# Altium PCB Copy of PCB1.PcbDoc (part 1 of 2)
Units mil, origin at the board's own origin, x right, y up, seen from the top; angles counter-clockwise.
Board outline 1968.5 x 1865.39 mil, 6 copper layers (Top Layer, GND02, SIG03, PWR04, GND05, Bottom Layer), stack 59.435 mil thick; 118 components, 79 nets, 398 pads, 210 vias.
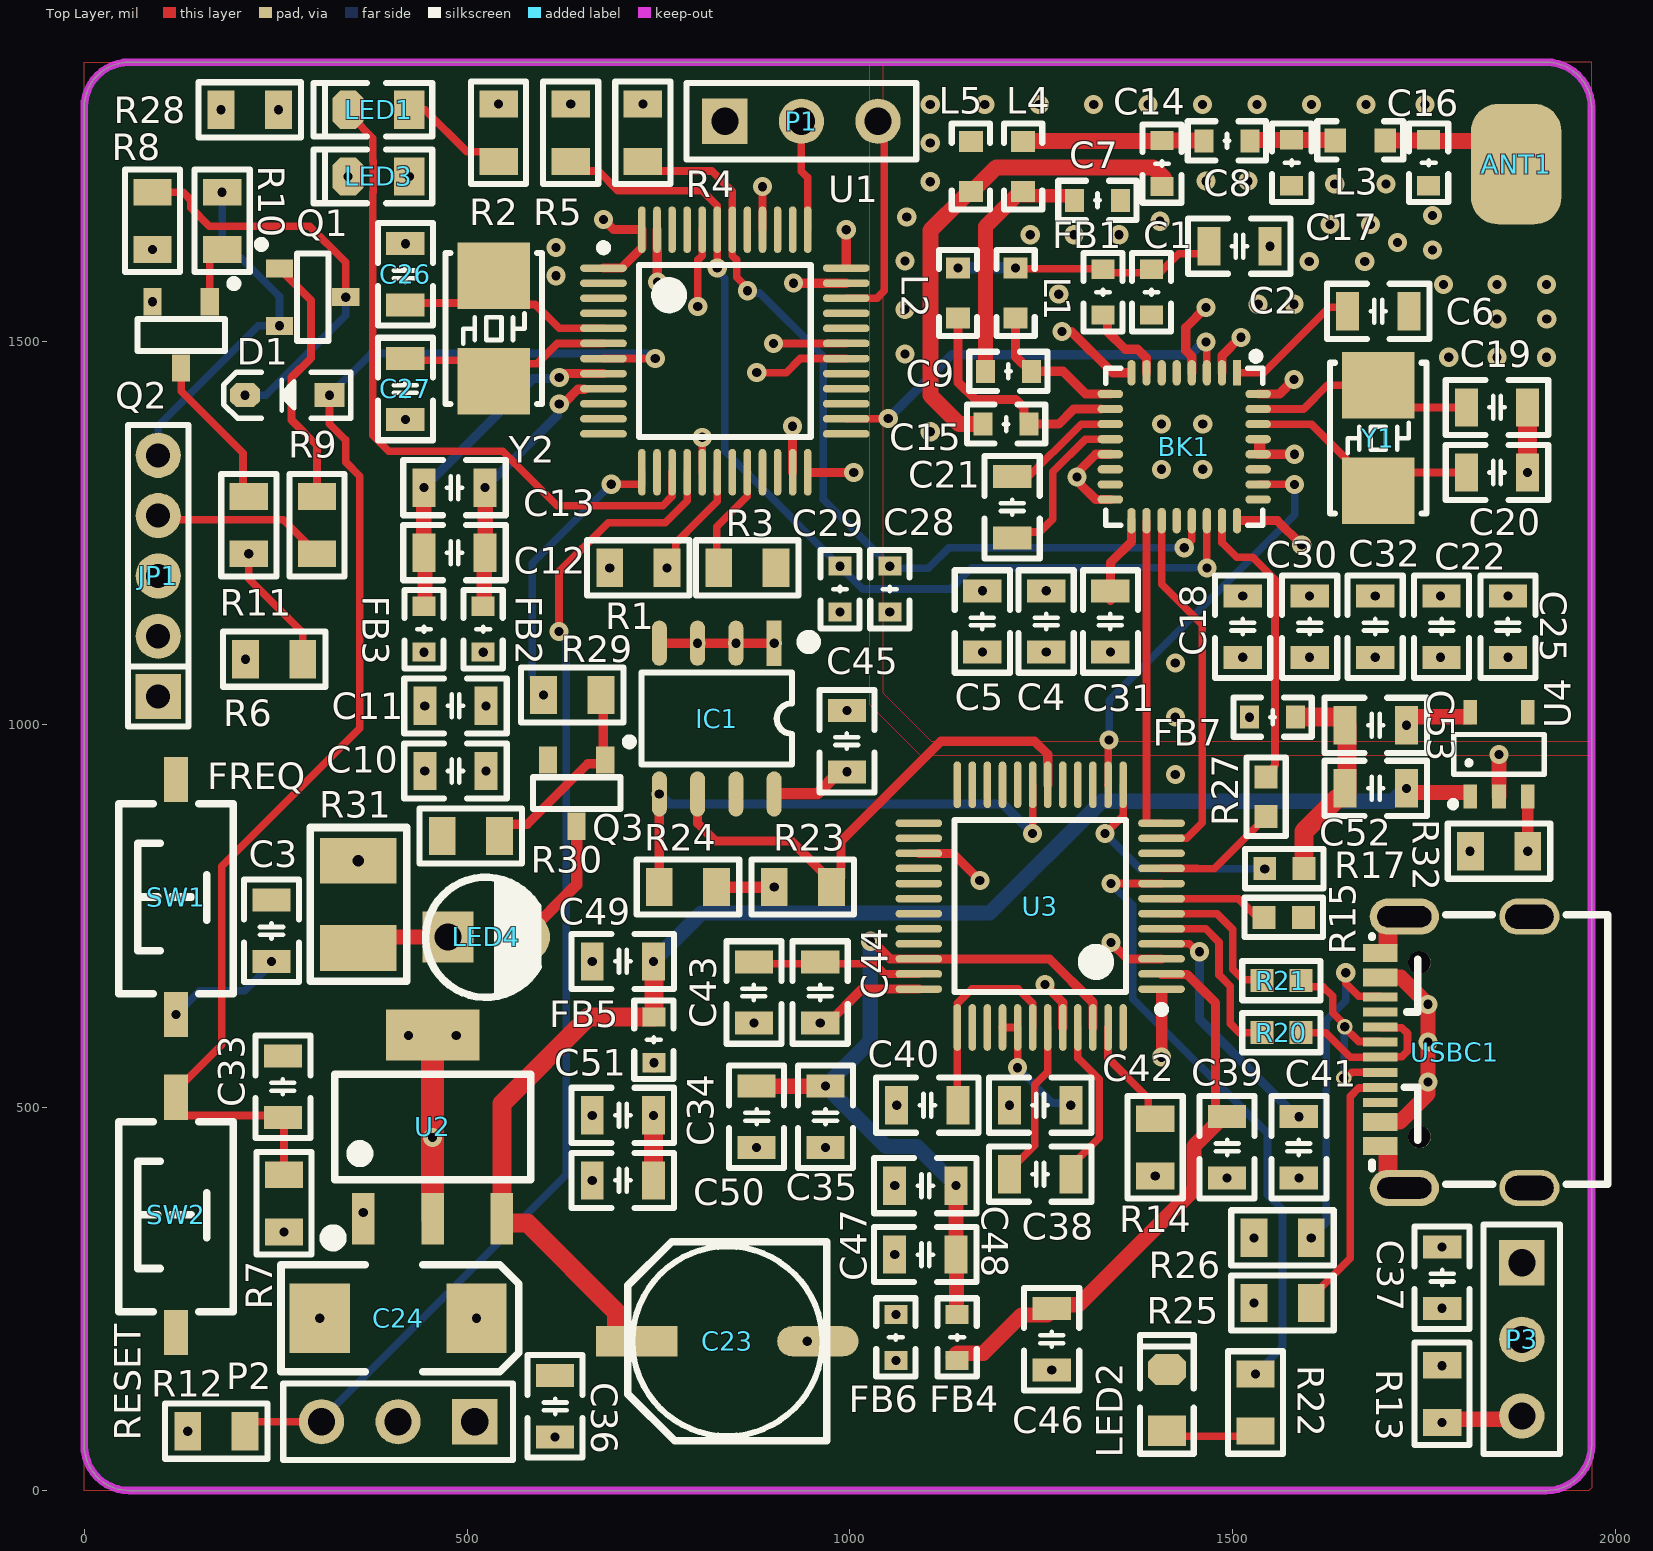
[diagram p0: Top Layer view]
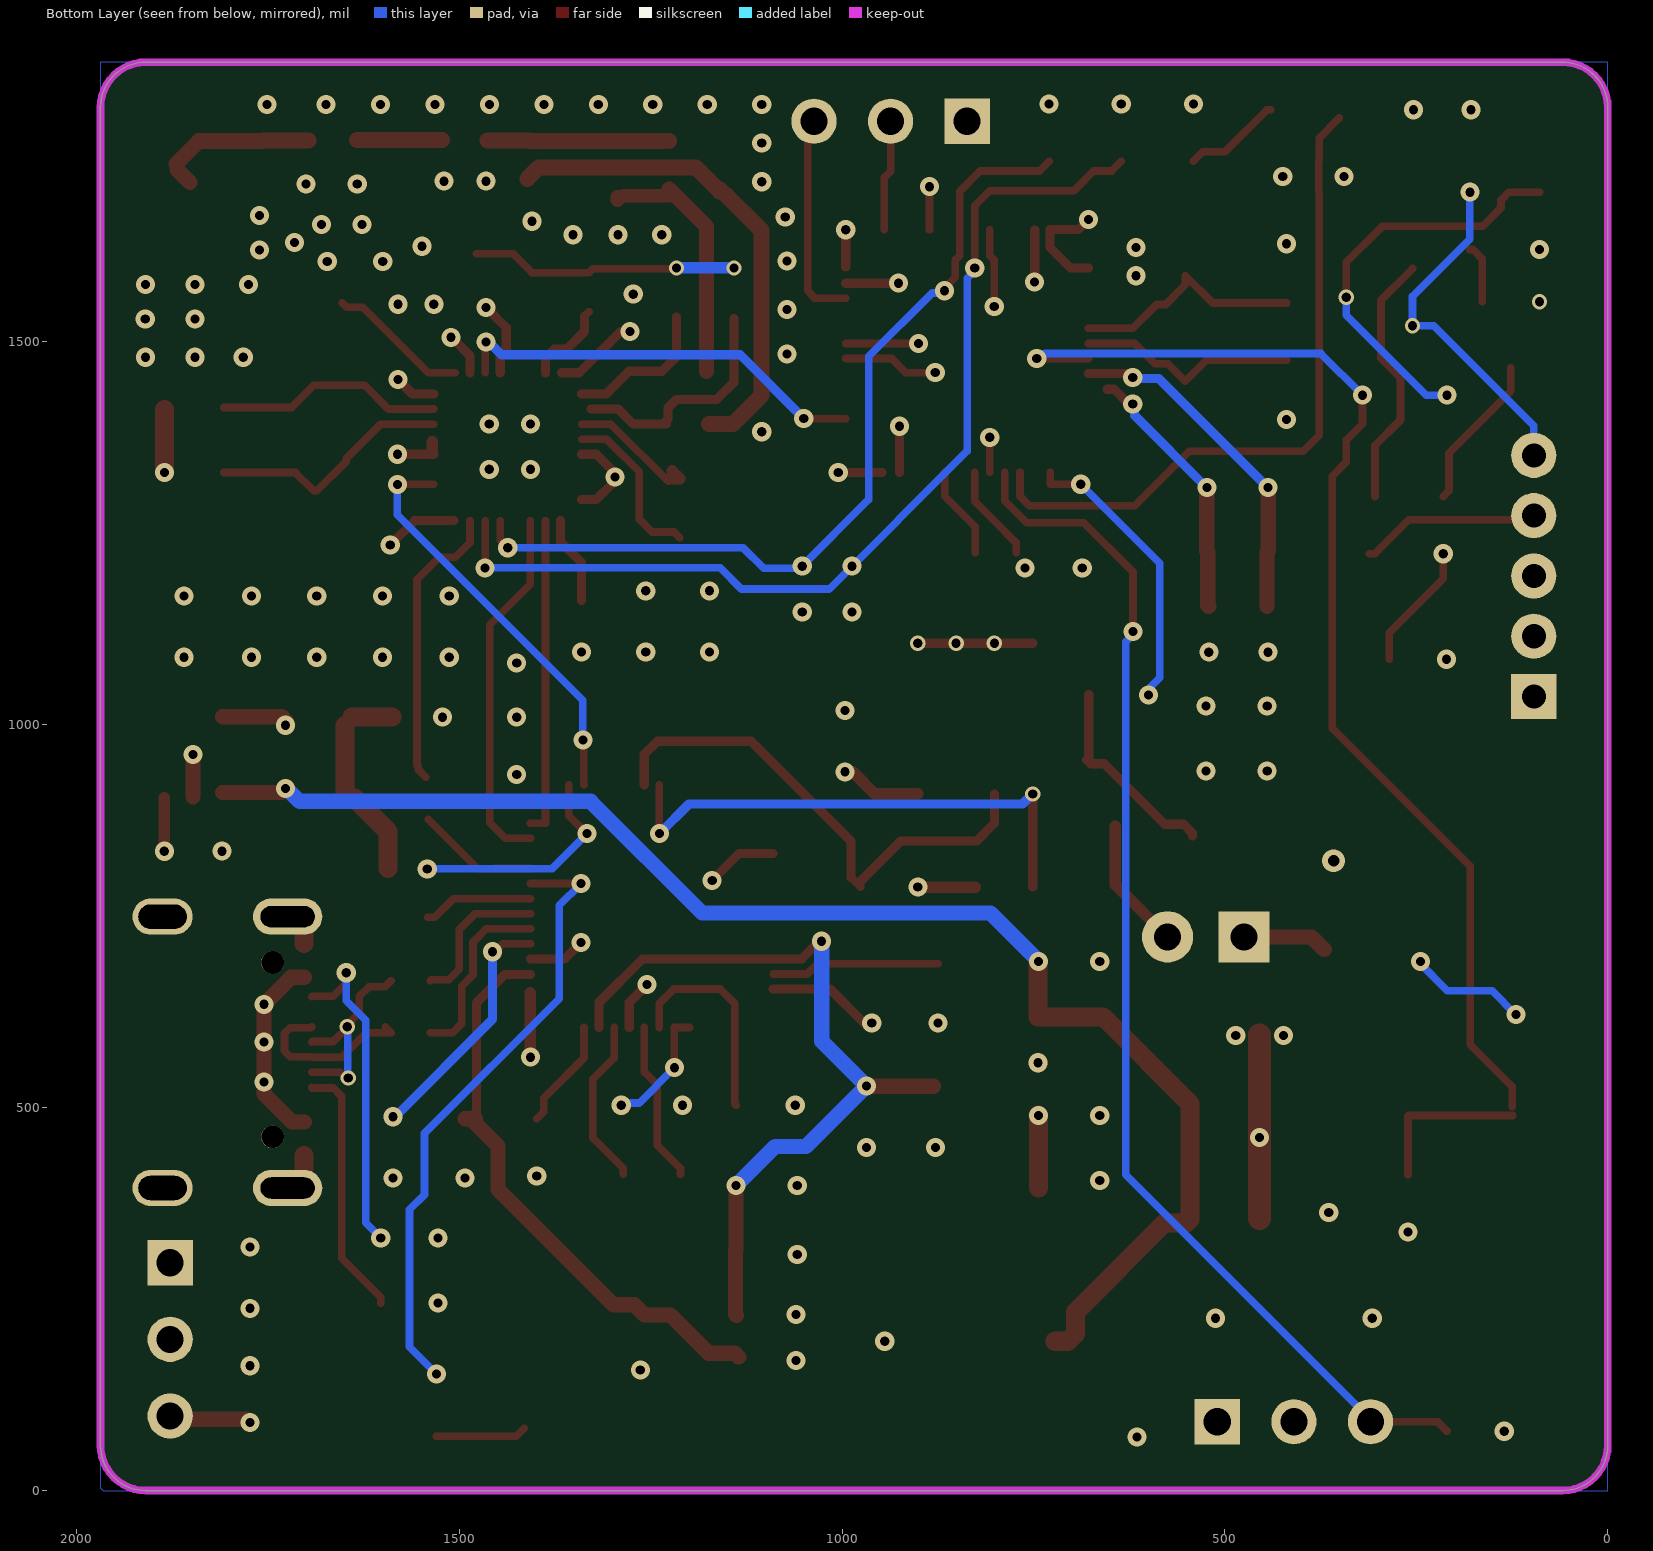
[diagram p1: Bottom Layer view, seen from below]
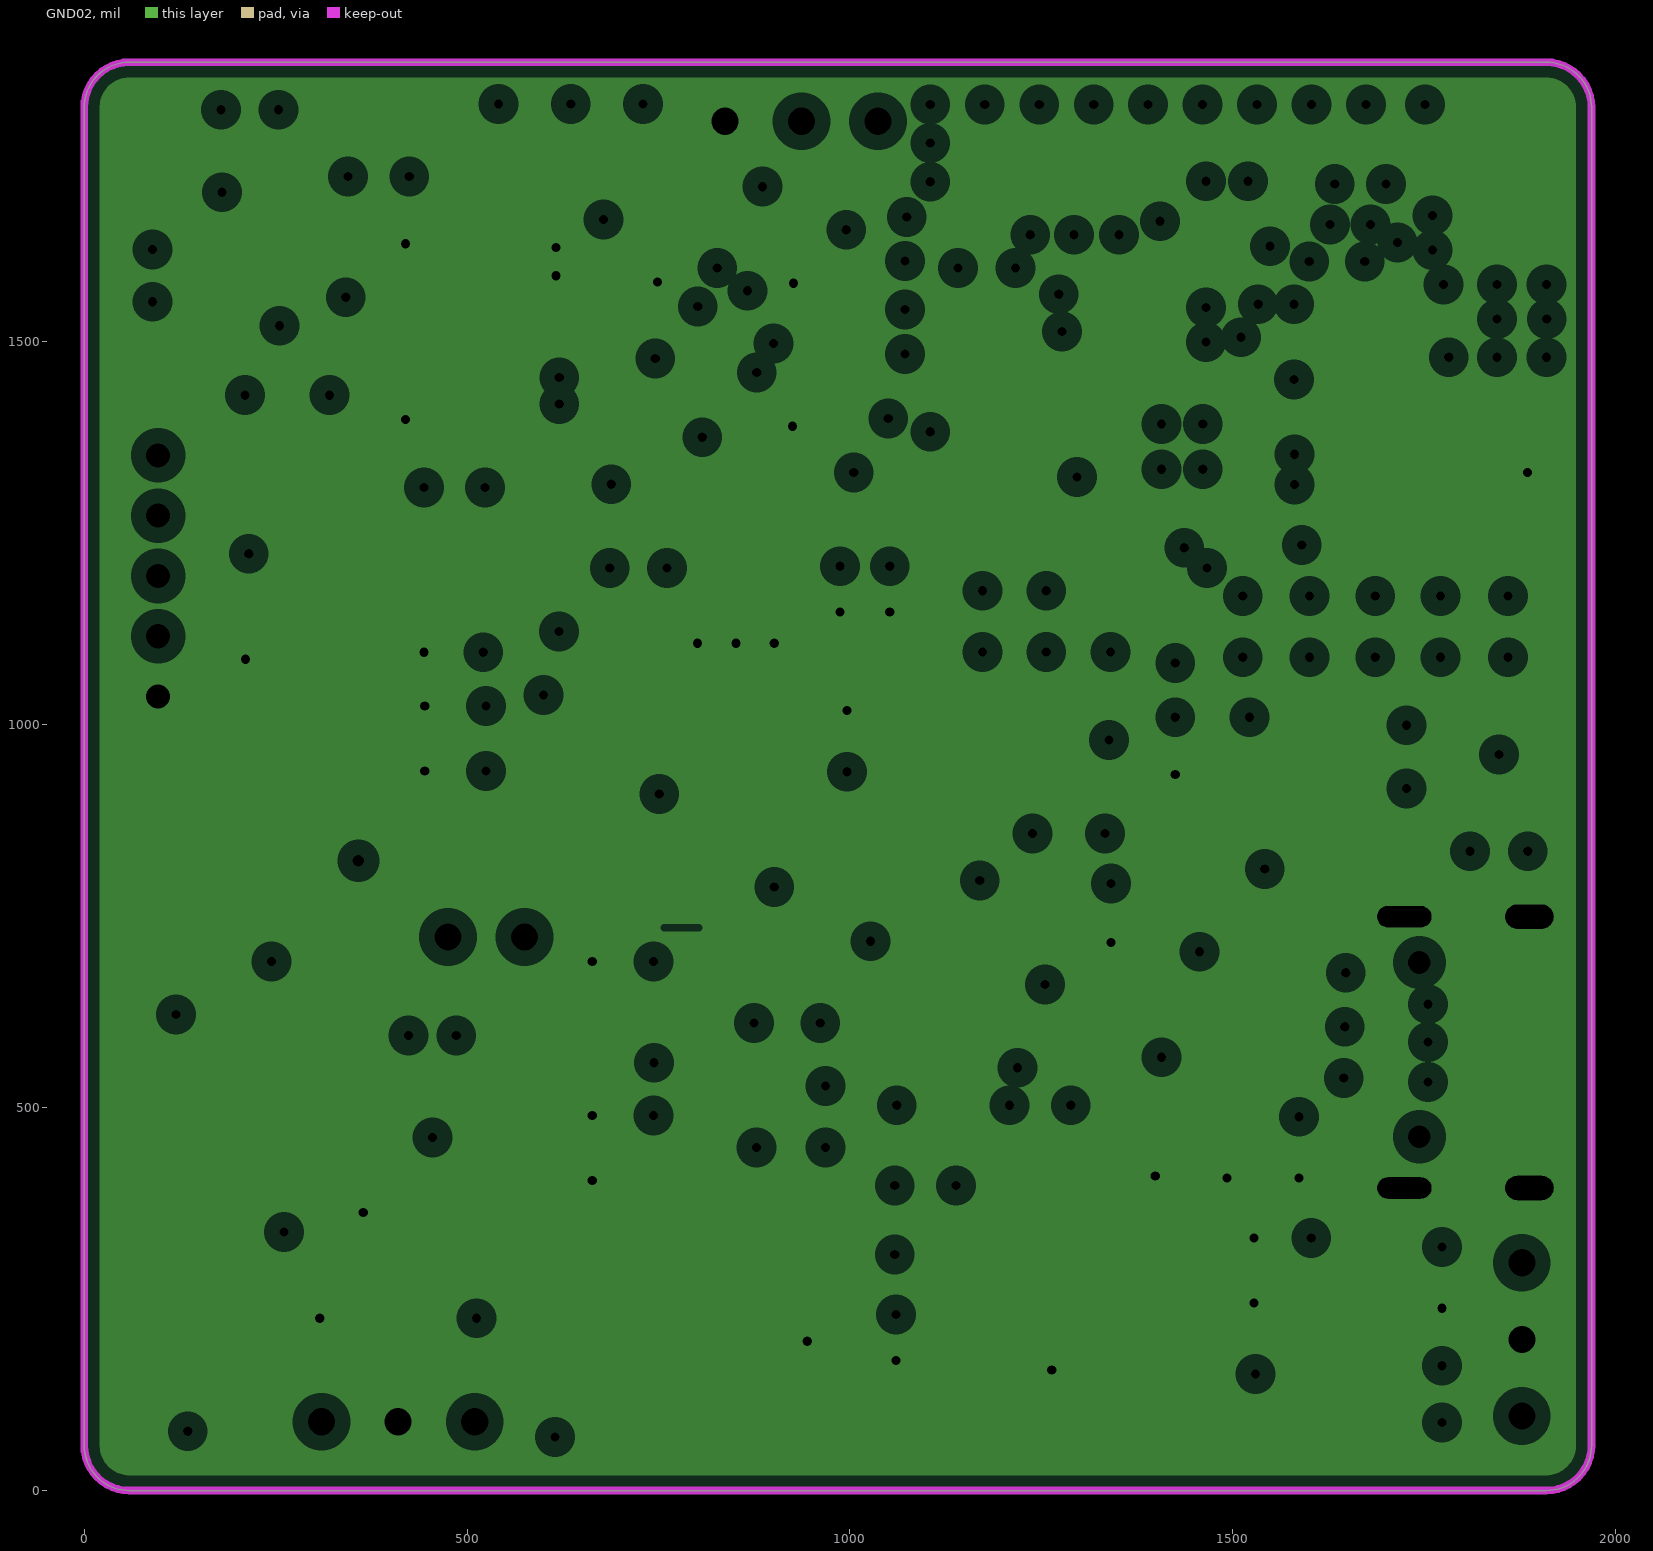
[diagram p2: GND02, clearances drawn from the general rule]
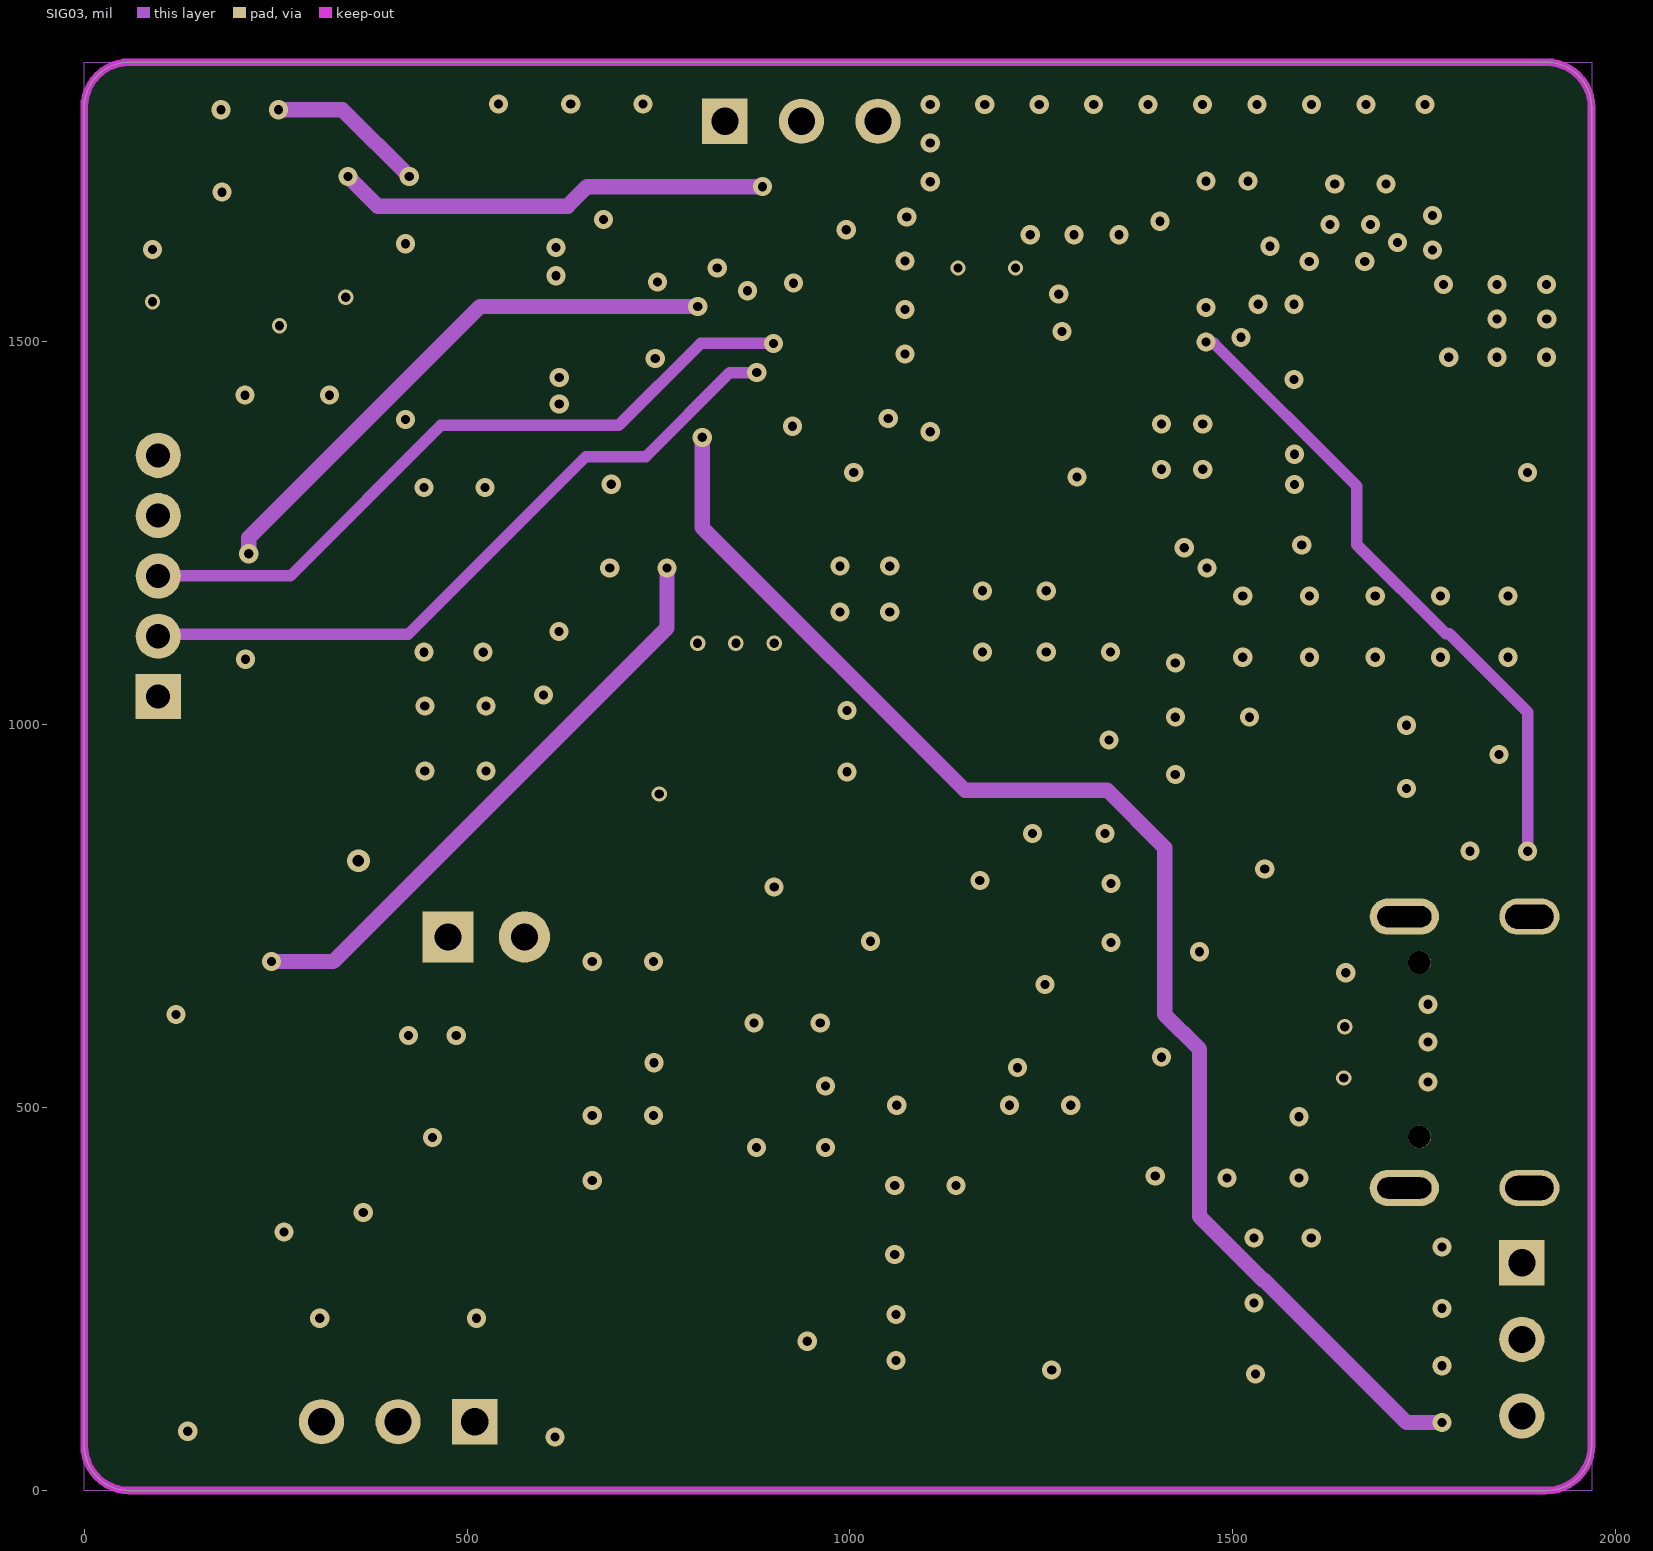
[diagram p3: SIG03]
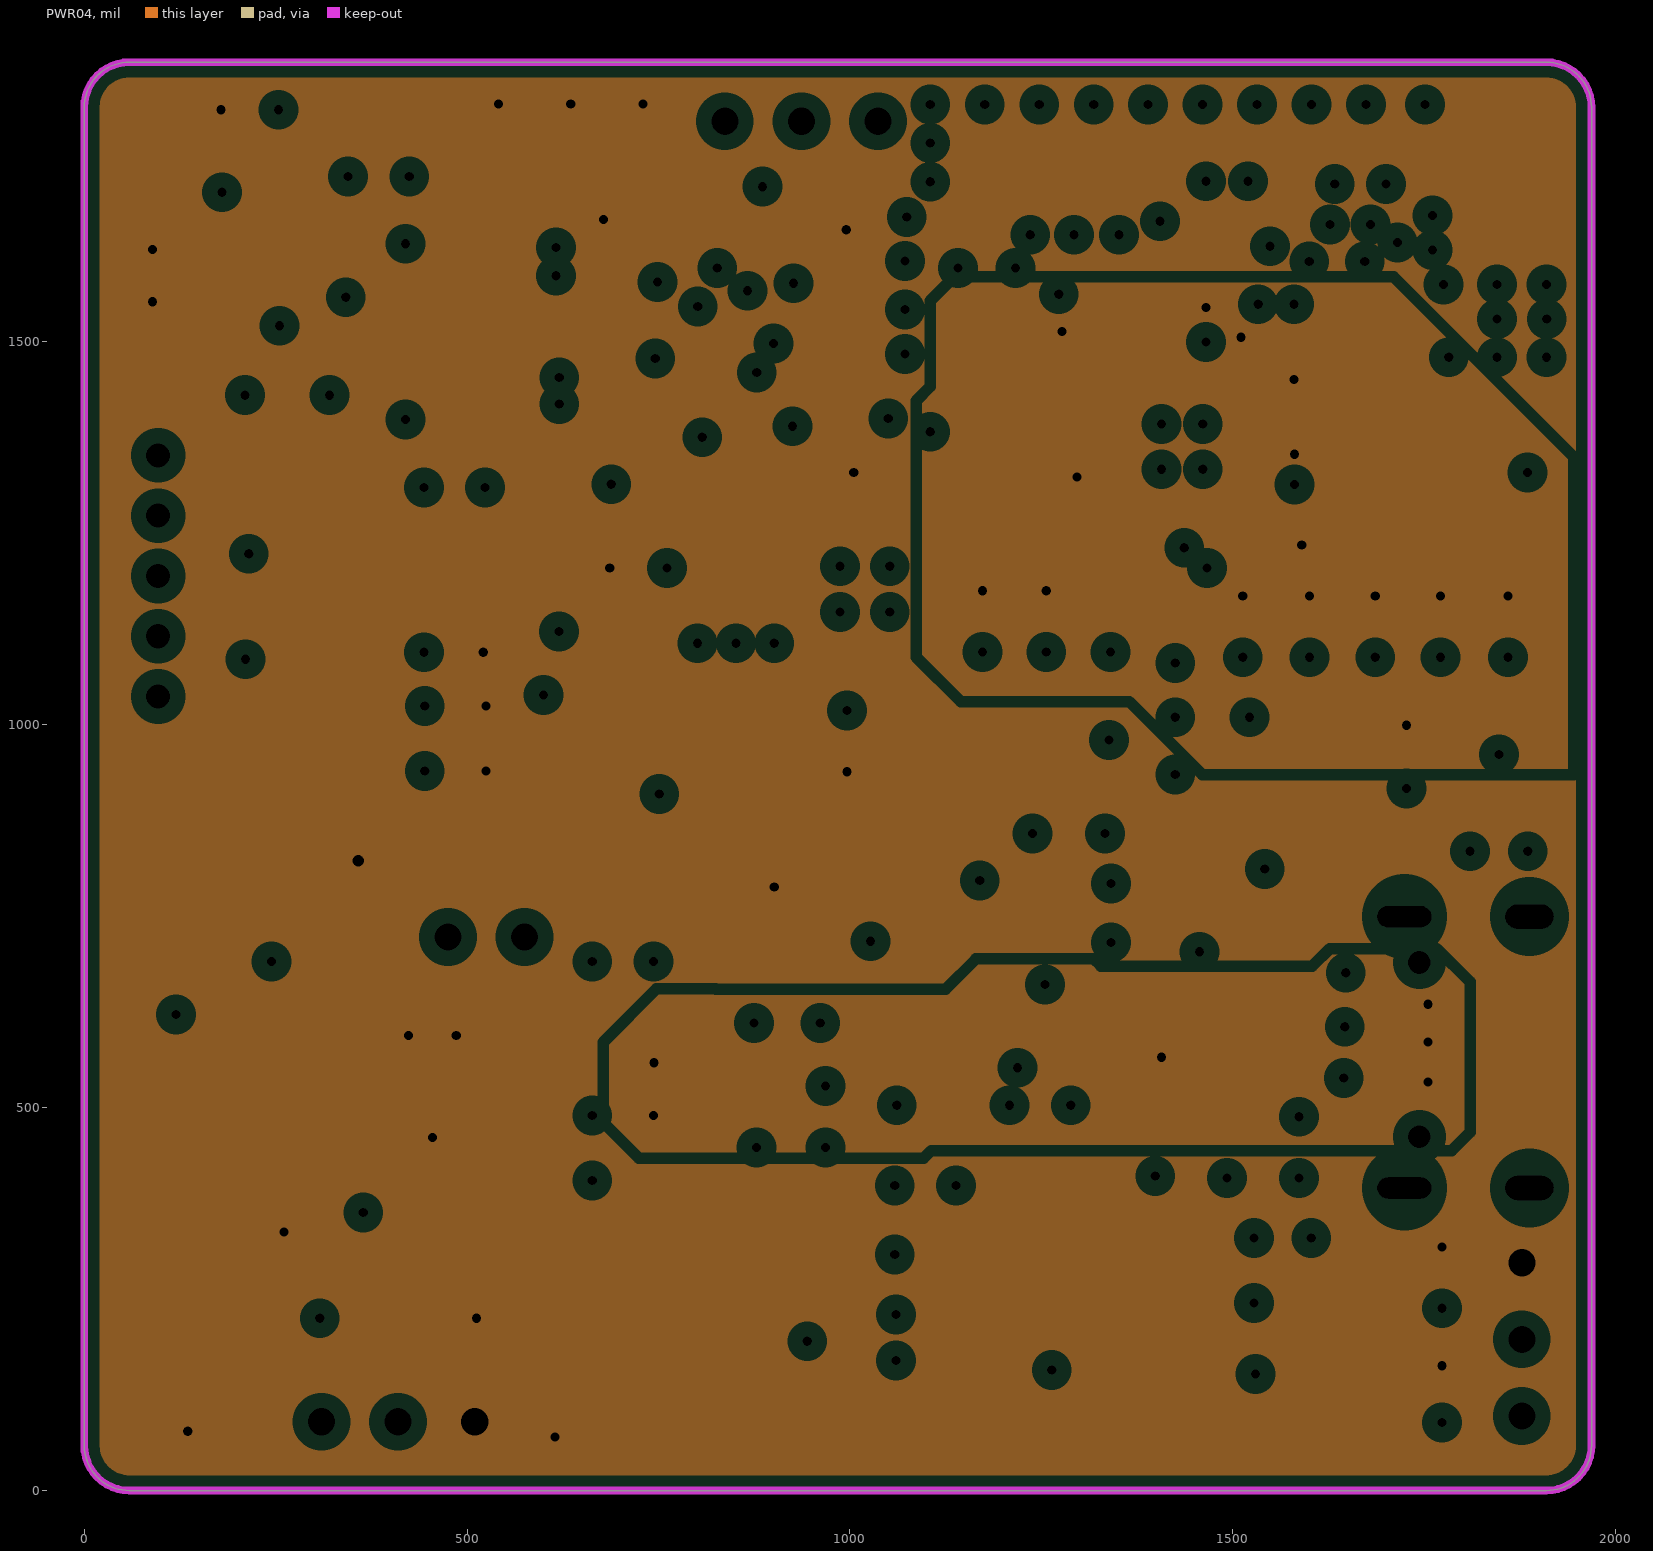
[diagram p4: PWR04, clearances drawn from the general rule]
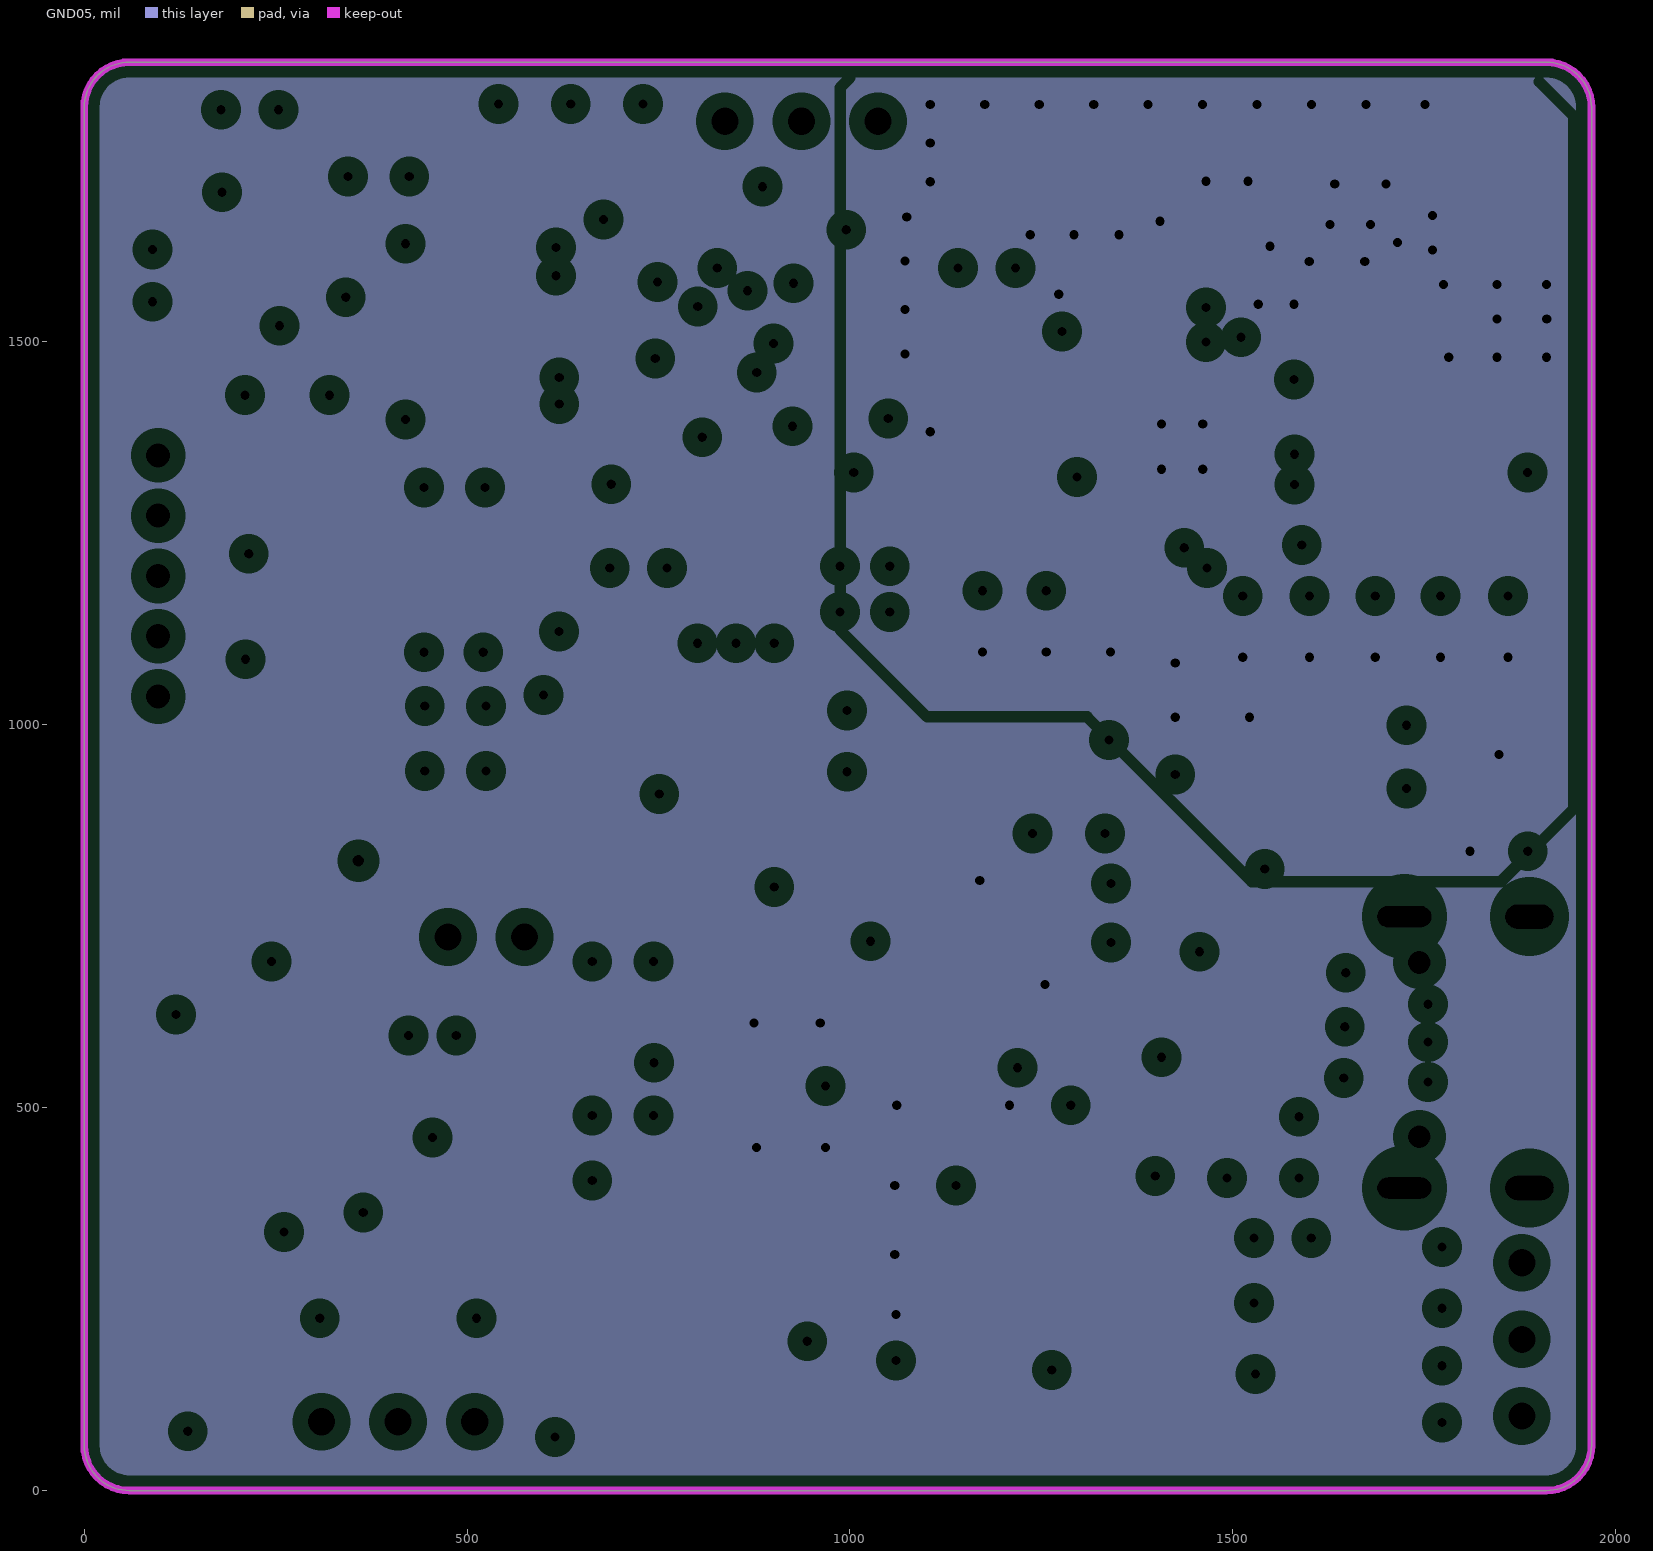
[diagram p5: GND05, clearances drawn from the general rule]

## Layer stack, top to bottom
Top Solder: solder mask 0.4, Solder Resist, Dk 3.5
Top Layer: signal copper 1.4
Dielectric 2: prepreg 3.8, PP-013, Dk 4.3
GND02: plane copper 0.7087, net GND
Dielectric 4: core 21, Core-037, Dk 4.8
SIG03: signal copper 0.7087
Dielectric 1: prepreg 4.2, PP-014, Dk 4.2
PWR04: plane copper 0.7087, net (Multiple Nets)
Dielectric 3: core 21, Core-037, Dk 4.8
GND05: plane copper 0.7087, net (Multiple Nets)
Dielectric 5: prepreg 3.8, PP-013, Dk 4.3
Bottom Layer: signal copper 1.4
Bottom Solder: solder mask 0.4, Solder Resist, Dk 3.5

## Board outline
0,59.06 0,1806.34 cw(c59.06,1806.34) 59.06,1865.39 1909.45,1865.39 cw(c1909.45,1806.34) 1968.5,1806.34 1968.5,59.06 cw(c1909.45,59.06) 1909.45,0 59.06,0 cw(c59.06,59.06)

## Design rules (kind name [scope] priority, off if disabled: settings)
AssemblyTestPointUsage [All] p0: scope1count=1 scope1_0_kind=Board scope1_0_value=Board scope2count=1 scope2_0_kind=Board scope2_0_value=Board commentlength=0
AssemblyTestpoint [All] p0: scope1count=1 scope1_0_kind=Board scope1_0_value=Board scope2count=1 scope2_0_kind=Board scope2_0_value=Board commentlength=0
Clearance Clearance_1 [All] p0 off: scope1count=1 scope1_0_kind=Layer scope1_0_value=TOP scope2count=1 scope2_0_kind=Board scope2_0_value=Board commentlength=48 gap=25 // Protel DXP Scope 2 Expression Was: InPolygon
Clearance [All] p0: scope1count=1 scope1_0_kind=Board scope1_0_value=Board scope2count=1 scope2_0_kind=Board scope2_0_value=Board commentlength=0 gap=8
Clearance Clearance_1 [OnLayer('Keep-Out Layer') vs InPolygon] p1: gap=25 ignorepadtopadclearanceinfootprint=FALSE
Clearance [All] p2: gap=8 ignorepadtopadclearanceinfootprint=TRUE
ComponentClearance [All] p0: scope1count=1 scope1_0_kind=Board scope1_0_value=Board scope2count=1 scope2_0_kind=Board scope2_0_value=Board commentlength=0 gap=10 collisioncheckmode=3
DiffPairsRouting [All] p0: scope1count=1 scope1_0_kind=Board scope1_0_value=Board scope2count=1 scope2_0_kind=Board scope2_0_value=Board commentlength=0
FabricationTestPointUsage [All] p0: scope1count=1 scope1_0_kind=Board scope1_0_value=Board scope2count=1 scope2_0_kind=Board scope2_0_value=Board commentlength=0 valid=0 allowmultiple=FALSE
FabricationTestpoint [All] p0: scope1count=1 scope1_0_kind=Board scope1_0_value=Board scope2count=1 scope2_0_kind=Board scope2_0_value=Board commentlength=0 side=3 testpointundercomponent=TRUE minsize=40 maxsize=100 preferedsize=60 minholesize=0 maxholesize=40 preferedholesize=32 testpointgrid=1
FanoutControl Fanout_BGA [All] p0 off: scope1count=1 scope1_0_kind=Board scope1_0_value=Board scope2count=1 scope2_0_kind=Board scope2_0_value=Board commentlength=69 // Protel DXP Scope 1 Expression Was: IsBGA   Fanout_BGA (Default Rule)
FanoutControl Fanout_LCC [All] p0 off: scope1count=1 scope1_0_kind=Board scope1_0_value=Board scope2count=1 scope2_0_kind=Board scope2_0_value=Board commentlength=69 // Protel DXP Scope 1 Expression Was: IsLCC   Fanout_LCC (Default Rule)
FanoutControl Fanout_SOIC [All] p0 off: scope1count=1 scope1_0_kind=Board scope1_0_value=Board scope2count=1 scope2_0_kind=Board scope2_0_value=Board commentlength=71 // Protel DXP Scope 1 Expression Was: IsSOIC   Fanout_SOIC (Default Rule)
FanoutControl Fanout_Small [All] p0 off: scope1count=1 scope1_0_kind=Board scope1_0_value=Board scope2count=1 scope2_0_kind=Board scope2_0_value=Board commentlength=84 // Protel DXP Scope 1 Expression Was: (CompPinCount < 5)   Fanout_Small (Default Rule)
FanoutControl Fanout_Default [All] p0: scope1count=1 scope1_0_kind=Board scope1_0_value=Board scope2count=1 scope2_0_kind=Board scope2_0_value=Board commentlength=30 // Fanout_Default (Default Rule)
Height [All] p0: scope1count=1 scope1_0_kind=Board scope1_0_value=Board scope2count=1 scope2_0_kind=Board scope2_0_value=Board commentlength=0
HoleSize [All] p0: scope1count=1 scope1_0_kind=Board scope1_0_value=Board scope2count=1 scope2_0_kind=Board scope2_0_value=Board commentlength=0 absolutevalues=TRUE maxlimit=100 minlimit=1 maxpercent=80.000 minpercent=20.000
HoleToHoleClearance [All] p0: scope1count=1 scope1_0_kind=Board scope1_0_value=Board scope2count=1 scope2_0_kind=Board scope2_0_value=Board commentlength=0
LayerPairs [All] p0: scope1count=1 scope1_0_kind=Board scope1_0_value=Board scope2count=1 scope2_0_kind=Board scope2_0_value=Board commentlength=0 enforce=TRUE
MinimumSolderMaskSliver [All] p0: scope1count=1 scope1_0_kind=Board scope1_0_value=Board scope2count=1 scope2_0_kind=Board scope2_0_value=Board commentlength=0
NetAntennae [All] p0: scope1count=1 scope1_0_kind=Board scope1_0_value=Board scope2count=1 scope2_0_kind=Board scope2_0_value=Board commentlength=0
PasteMaskExpansion [All] p0: scope1count=1 scope1_0_kind=Board scope1_0_value=Board scope2count=1 scope2_0_kind=Board scope2_0_value=Board commentlength=0 expansion=0
PlaneClearance [All] p0: scope1count=1 scope1_0_kind=Board scope1_0_value=Board scope2count=1 scope2_0_kind=Board scope2_0_value=Board commentlength=0 clearance=20
PlaneClearance [All] p1: clearance=20
PlaneConnect [All] p0: scope1count=1 scope1_0_kind=Board scope1_0_value=Board scope2count=1 scope2_0_kind=Board scope2_0_value=Board commentlength=0 planeconnectstyle=Relief reliefexpansion=20 reliefentries=4 reliefconductorwidth=15 reliefairgap=10
PlaneConnect [All] p1: pad.planeconnectstyle=Relief pad.reliefexpansion=20 pad.reliefentries=4 pad.reliefconductorwidth=15 pad.reliefairgap=10 via.planeconnectstyle=Direct via.reliefexpansion=20 via.reliefentries=4 via.reliefconductorwidth=10 via.reliefairgap=10
PolygonConnect [All] p0: scope1count=1 scope1_0_kind=Board scope1_0_value=Board scope2count=1 scope2_0_kind=Board scope2_0_value=Board commentlength=0 connectstyle=Relief reliefconductorwidth=15 reliefentries=4 polygonreliefangle="90 Angle"
PolygonConnect [All] p1: thpad.connectstyle=Relief thpad.reliefconductorwidth=15 thpad.reliefentries=4 thpad.polygonreliefangle="90 Angle" thpad.airgapwidth=10 smdpad.connectstyle=Relief smdpad.reliefconductorwidth=10 smdpad.reliefentries=4 smdpad.polygonreliefangle="90 Angle" smdpad.airgapwidth=10 via.connectstyle=Direct via.reliefconductorwidth=10 via.reliefentries=4 via.polygonreliefangle="90 Angle" via.airgapwidth=10
RoutingCorners [All] p0: scope1count=1 scope1_0_kind=Board scope1_0_value=Board scope2count=1 scope2_0_kind=Board scope2_0_value=Board commentlength=0 cornerstyle=45-Degree minsetback=100 maxsetback=100
RoutingLayers [All] p0: scope1count=1 scope1_0_kind=Board scope1_0_value=Board scope2count=1 scope2_0_kind=Board scope2_0_value=Board commentlength=0 top layer=Automatic mid layer 1=Automatic bottom layer=Automatic
RoutingPriority [All] p0: scope1count=1 scope1_0_kind=Board scope1_0_value=Board scope2count=1 scope2_0_kind=Board scope2_0_value=Board commentlength=0
RoutingTopology [All] p0: scope1count=1 scope1_0_kind=Board scope1_0_value=Board scope2count=1 scope2_0_kind=Board scope2_0_value=Board commentlength=0 topology=Shortest
RoutingVias [All] p0: scope1count=1 scope1_0_kind=Board scope1_0_value=Board scope2count=1 scope2_0_kind=Board scope2_0_value=Board commentlength=0 holewidth=12 width=25 viastyle="Through Hole" minholewidth=12 minwidth=20 maxholewidth=25 maxwidth=35
RoutingVias [All] p1: holewidth=12 width=25 viastyle="Through Hole" minholewidth=12 minwidth=20 maxholewidth=25 maxwidth=35
ShortCircuit [All] p0: scope1count=1 scope1_0_kind=Board scope1_0_value=Board scope2count=1 scope2_0_kind=Board scope2_0_value=Board commentlength=0 allowed=FALSE
SilkToBoardRegionClearance [All] p0: scope1count=1 scope1_0_kind=Board scope1_0_value=Board scope2count=1 scope2_0_kind=Board scope2_0_value=Board commentlength=0
SilkToSilkClearance [All] p0: scope1count=1 scope1_0_kind=Board scope1_0_value=Board scope2count=1 scope2_0_kind=Board scope2_0_value=Board commentlength=0
SilkToSilkClearance [All] p1: silktosilkclearance=2
SilkToSolderMaskClearance [All] p0 off: scope1count=1 scope1_0_kind=Board scope1_0_value=Board scope2count=1 scope2_0_kind=Board scope2_0_value=Board commentlength=44 // Protel DXP Scope 1 Expression Was: IsPad
SilkToSolderMaskClearance [IsPad] p1: minsilkscreentomaskgap=2 clearancetoexposedcopper=TRUE
SolderMaskExpansion [All] p0: scope1count=1 scope1_0_kind=Board scope1_0_value=Board scope2count=1 scope2_0_kind=Board scope2_0_value=Board commentlength=0 expansion=4
SolderMaskExpansion [All] p1: expansion=4 istentingtop=FALSE
UnRoutedNet [All] p0: scope1count=1 scope1_0_kind=Board scope1_0_value=Board scope2count=1 scope2_0_kind=Board scope2_0_value=Board commentlength=0
UnpouredPolygon [All] p0: scope1count=1 scope1_0_kind=Board scope1_0_value=Board scope2count=1 scope2_0_kind=Board scope2_0_value=Board commentlength=0
Width PWR [All] p0: scope1count=1 scope1_0_kind=NetClass scope1_0_value=PWR scope2count=1 scope2_0_kind=Board scope2_0_value=Board commentlength=0 maxlimit=50 minlimit=10 preferedwidth=20
Width [All] p0: scope1count=1 scope1_0_kind=Board scope1_0_value=Board scope2count=1 scope2_0_kind=Board scope2_0_value=Board commentlength=0 maxlimit=30 minlimit=8 preferedwidth=15
Width PWR [InNetClass('PWR')] p1: maxlimit=50 minlimit=10 preferedwidth=20 toplayer_prefwidth=15 midlayer1_minwidth=15 bottomlayer_prefwidth=15 minimp=50.000000 maximp=50.000000 favimp=50.000000
Width [All] p2: maxlimit=30 minlimit=8 preferedwidth=15 toplayer_prefwidth=10 midlayer1_minwidth=12 bottomlayer_prefwidth=10 minimp=50.000000 maximp=50.000000 favimp=50.000000
26 further rules are at their usual default settings.

## Classes and differential pairs
net class PWR: 3V3 +3.3V +3.3VA GND GNDA GNDRF RF3V3 USB_5V VBUS VDDA VSSA

## Components (designator, comment, footprint, x,y, rotation, side; value= is the part's Value field where it differs from the comment)
ANT1 "" ANT 1864.93,1721.5 r90 top
BK1 "" "QFN32 5X5_N" 1436.65,1363.21 r180 top
C1 "Cap" "C 0603_L" 1393.82,1565 r90 top
C2 "Cap" "C 0805_L" 1508.66,1625.01 r180 top
C3 "Cap" "C 0805_L" 244.65,730.96 r270 top
C4 "Cap" "C 0805_L" 1256.37,1135 r90 top
C5 "Cap" "C 0805_L" 1173,1135 r90 top
C6 "Cap" "C 0805_L" 1690,1540 r180 top
C7 "Cap" "C 0603_L" 1323.31,1685 r180 top
C8 "Cap" "C 0603_L" 1492.41,1762.64 r0 top
C9 "Cap" "C 0603_L" 1207,1461.67 r180 top
C10 "Cap" "C 0805_L" 484.88,939.74 r0 top
C11 "Cap" "C 0805_L" 484.88,1024.74 r0 top
C12 "Cap" "C 0805_L" 483.66,1224.74 r0 top
C13 "Cap" "C 0805_L" 483.66,1309.74 r0 top
C14 "Cap" "C 0603_L" 1407.62,1733 r90 top
C15 "Cap" "C 0603_L" 1204,1392.74 r180 top
C16 "Cap" "C 0603_L" 1755.88,1734 r270 top
C17 "Cap" "C 0603_L" 1577,1734 r270 top
C18 "Cap" "C 0805_L" 1513,1128.21 r270 top
C19 "Cap" "C 0805_L" 1845,1414.49 r0 top
C20 "Cap" "C 0805_L" 1845,1329.49 r0 top
C21 "Cap" "C 0805_L" 1211.99,1284.2 r270 top
C22 "Cap" "C 0805_L" 1772.66,1128.21 r90 top
C23 "Cap Pol1" "CM D(6.3*5.4)" 840,195 r180 top
C24 "Cap Pol1" "CD C(6032)" 410,225 r180 top
C25 "Cap" "C 0805_L" 1859.33,1128.21 r270 top
C26 "Cap" "C 0805_L" 419.49,1588.32 r270 top
C27 "Cap" "C 0805_L" 419.49,1438.62 r90 top
C28 "Cap" "C 0603_L" 1052.11,1177.21 r90 top
C29 "Cap" "C 0603_L" 987.11,1177.21 r90 top
C30 "Cap" "C 0805_L" 1600.38,1128.21 r90 top
C31 "Cap" "C 0805_L" 1340.17,1135 r90 top
C32 "Cap" "C 0805_L" 1686.06,1128.21 r90 top
C33 "Cap" "C 0805_L" 259.6,527.32 r270 top
C34 "Cap" "C 0805_L" 878.1,488.21 r90 top
C35 "Cap" "C 0805_L" 968.1,488.21 r90 top
C36 "Cap" "C 0805_L" 615,110 r90 top
C37 "Cap" "C 0805_L" 1773.4,278 r270 top
C38 "Cap" "C 0805_L" 1248.5,413.21 r0 top
C39 "Cap" "C 0805_L" 1492.54,448.21 r90 top
C40 "Cap" "C 0805_L" 1101.14,503.21 r0 top
C41 "Cap" "C 0805_L" 1586.34,448.21 r90 top
C42 "Cap" "C 0805_L" 1248.5,503.21 r0 top
C43 "Cap" "C 0805_L" 874.64,650.41 r90 top
C44 "Cap" "C 0805_L" 961.25,650.41 r90 top
C45 "Cap" "C 0805_L" 996.12,978.62 r90 top
C46 "Cap" "C 0805_L" 1263.5,197.62 r90 top
C47 "Cap" "C 0805_L" 1098.5,308.21 r0 top
C48 "Cap" "C 0805_L" 1098.5,398.21 r0 top
C49 "Cap" "C 0805_L" 703.5,691.05 r0 top
C50 "Cap" "C 0805_L" 703.5,405 r0 top
C51 "Cap" "C 0805_L" 703.5,490 r0 top
C52 "Cap" "C 0805_L" 1686.68,917.03 r180 top
C53 "Cap" "C 0805_L" 1686.68,999.41 r180 top
D1 "1N4148" SOD-323 265.2,1430.53 r180 top
FB1 "Ferrite bead" "C 0603_L" 1330.58,1565 r270 top
FB2 "Ferrite bead" "C 0603_L" 521.06,1124.9 r90 top
FB3 "Ferrite bead" "C 0603_L" 443.86,1124.9 r90 top
FB4 "Ferrite bead" "C 0603_L" 1140,200 r90 top
FB5 "Ferrite bead" "C 0603_L" 744.03,588.64 r270 top
FB6 "Ferrite bead" "C 0603_L" 1060,200 r90 top
FB7 "Ferrite bead" "C 0603_L" 1552,1010 r180 top
IC1 "24Cxx" SOP8_L 826.1,1008.21 r270 top
JP1 "HDR-1X5" HDR2.0-LI-5P 96.65,1194.47 r90 top
L1 "L" "L 0603" 1216.34,1563.96 r90 top
L2 "L" "L 0603" 1141.18,1563.96 r90 top
L3 "L" "L 0603" 1666.5,1763.23 r180 top
L4 "L" "L 0603" 1226.14,1729 r270 top
L5 "L" "L 0603" 1158.07,1729 r270 top
LED1 "红色" "LED 0805R" 384.58,1803.21 r180 top
LED2 "蓝色" "LED 0805B" 1414.02,118.07 r90 top
LED3 "蓝色" "LED 0805B" 384.58,1716.11 r180 top
LED4 "红外" "LED 3MM-R" 525,723.02 r0 top
P1 "Header 3" HDR1X3 836.65,1788.21 r0 top
P2 "Header 3" HDR1X3 510,89.94 r180 top
P3 "Header 3" HDR1X3 1877.5,297.5 r270 top
Q1 "SS8050" SOT-23-3L 294.37,1558.48 r0 top
Q2 "SS8550" SOT-23-3L 126.65,1513.21 r270 top
Q3 "AO3400" SOT-23-3L 643.05,914.81 r270 top
R1 "Resistor" "R 0805_L" 723.74,1205.01 r180 top
R2 "Resistor" "R 0805_L" 541.24,1773.21 r90 top
R3 "Resistor" "R 0805_L" 866.1,1205 r0 top
R4 "Resistor" "R 0805_L" 729.62,1773.21 r270 top
R5 "Resistor" "R 0805_L" 635.43,1773.21 r270 top
R6 "Resistor" "R 0805_L" 248,1085.7 r180 top
R7 "Resistor" "R 0805_L" 260.88,375 r270 top
R8 "Resistor" "R 0805_L" 89.25,1658.21 r90 top
R9 "Resistor" "R 0805_L" 304.16,1260.74 r90 top
R10 "Resistor" "R 0805_L" 180.2,1658.21 r270 top
R11 "Resistor" "R 0805_L" 215,1260.74 r270 top
R12 "Resistor" "R 0805_L" 172.6,77.5 r180 top
R13 "Resistor" "R 0805_L" 1773.39,126.19 r90 top
R14 "Resistor" "R 0805_L" 1398.75,448.21 r270 top
R15 "Resistor" "R 0603_L" 1566.66,748.64 r0 top
R17 "Resistor" "R 0603_L" 1567.34,812.19 r0 top
R20 "Resistor" "R 0603_L" 1563.5,597.93 r180 top
R21 "Resistor" "R 0603_L" 1563.5,665.85 r0 top
R22 "Resistor" "R 0805_L" 1529.76,115 r90 top
R23 "Resistor" "R 0805_L" 938.5,788.21 r180 top
R24 "Resistor" "R 0805_L" 788.5,788.21 r0 top
R25 "Resistor" "R 0805_L" 1565,245 r0 top
R26 "Resistor" "R 0805_L" 1565,330 r180 top
R27 "Resistor" "R 0603_L" 1543.63,906.05 r90 top
R28 "Resistor" "R 0805_L" 216.19,1803.21 r180 top
R29 "Resistor" "R 0805_L" 637.38,1039.03 r180 top
R30 "Resistor" "R 0805_L" 505,854.91 r0 top
R31 "Resistor" "R 1210_L" 358.15,765.43 r90 top
R32 "Resistor" "R 0805_L" 1847.72,834.98 r0 top
SW1 "3x6x5" "TSW SMD-3*6*2.5" 120,775.14 r90 top
SW2 "3x6x5" "TSW SMD-3*6*2.5" 120,360 r90 top
U1 "STM32L051C8T6" LQFP48_L 836.65,1488.21 r0 top
U2 "LT1117-3V3" SOT223_L 455,475 r0 top
U3 "SSS1700" LQFP48_L 1248.5,763.21 r180 top
U4 "RT9013" SOT23-5L 1847.72,961.37 r0 top
USBC1 "TYPE-C 2.0 -16P" USB-C-SMD_TYPE-C-USB-5 1790,572.35 r90 top
Y1 "24.576M" "OSC 5032-2P" 1690,1374.49 r270 top
Y2 "8MHz ±20ppm 20pF" "OSC 5032-2P" 535,1517.52 r90 top

## Footprints (in the part's own frame and the unit in brackets; to place one, negate y for a bottom-side part, rotate by r counter-clockwise, add the part's x,y. Pads: shape width x height; smd on the part's side, far side on the other; paste and mask are expansions set on the pad)
ANT [mm]
  rrect60% 4x3 smd: 1(0.274,-0.129)
"C 0603_L" [mil] "无极性贴片电容                                       淘宝ID:黄晶宝石"
  rect 25x30 smd: 1(-30,0) 2(30,0)
  silkscreen extent -51,-26 51,26
"C 0805_L" [mil] "无极性贴片电容                                        淘宝ID:黄晶宝石"
  rect 30x50 smd: 1(-40,0) 2(40,0)
  silkscreen extent -67,-36 67,36
"CD C(6032)" [mm] "长6.0mm，宽3.2mm，厚2.5mm      淘宝ID:黄晶宝石"
  rect 2x2.3 smd: 1(-2.6,0) 2(2.6,0)
  silkscreen extent -4,-1.78 3.89,1.78
"CM D(6.3*5.4)" [mm] "贴片电解电容，直径6.3mm，高5.4mm           淘宝ID:黄晶宝石"
  rect 2.7x1 smd: 1(3,0)
  oval 2.7x1 smd: 2(-3,0)
  silkscreen extent -3.3,-3.3 3.3,3.3
HDR1X3 [mm] "Connector; Header; 3 Position"
  rect 1.5x1.5 hole 0.9: 1(0,0)
  round 1.5 hole 0.9: 2(2.54,0) 3(5.08,0)
  silkscreen extent -1.27,-1.27 6.35,1.27
HDR2.0-LI-5P [mm] "直插，脚距：2.0mm"
  rect 1.5x1.5 hole 0.8: 1(-4,0)
  round 1.5 hole 0.8: 2(-2,0) 3(0,0) 4(2,0) 5(4,0)
  silkscreen extent -5,-1 5,1
"L 0603" [mm] "小功率贴片电感        淘宝ID:黄晶宝石"
  rect 0.7x0.8 smd: 1(-0.83,0) 2(0.83,0)
  silkscreen extent -1.43,-0.64 1.43,0.64
"LED 3MM-R" [mm] "红色3mm直插LED                                   淘宝ID:黄晶宝石"
  rect 1.7x1.7 hole 0.9: 1(-1.27,0)
  round 1.7 hole 0.9: 2(1.27,0)
  silkscreen extent -2.01,-2 1.72,1.98
"LED 0805B" [mil] "蓝色0805LED                                    淘宝ID:黄晶宝石"
  rect 40x50 smd: 1(-40,0)
  oct 40x50 smd: 2(40,0)
  silkscreen extent -70,-35 85,35
"LED 0805R" [mil] "红色0805LED                                       淘宝ID:黄晶宝石"
  rect 40x50 smd: 1(-40,0)
  oct 40x50 smd: 2(40,0)
  silkscreen extent -70,-35 85,35
LQFP48_L [mm] "封装库来自淘宝 ID：黄晶宝石 Thin QFP, 48-Leads, Body 7x7mm, Pitch 0.5mm, IPC High Density"
  oval 1.55x0.25 smd: 1(-4.025,2.75) 2(-4.025,2.25) 3(-4.025,1.75) 4(-4.025,1.25) 5(-4.025,0.75) 6(-4.025,0.25) 7(-4.025,-0.25) 8(-4.025,-0.75) 9(-4.025,-1.25) 10(-4.025,-1.75) 11(-4.025,-2.25) 12(-4.025,-2.75) 25(4.025,-2.75) 26(4.025,-2.25) 27(4.025,-1.75) 28(4.025,-1.25) 29(4.025,-0.75) 30(4.025,-0.25) 31(4.025,0.25) 32(4.025,0.75) 33(4.025,1.25) 34(4.025,1.75) 35(4.025,2.25) 36(4.025,2.75)
  oval 0.25x1.55 smd: 13(-2.75,-4.025) 14(-2.25,-4.025) 15(-1.75,-4.025) 16(-1.25,-4.025) 17(-0.75,-4.025) 18(-0.25,-4.025) 19(0.25,-4.025) 20(0.75,-4.025) 21(1.25,-4.025) 22(1.75,-4.025) 23(2.25,-4.025) 24(2.75,-4.025) 37(2.75,4.025) 38(2.25,4.025) 39(1.75,4.025) 40(1.25,4.025) 41(0.75,4.025) 42(0.25,4.025) 43(-0.25,4.025) 44(-0.75,4.025) 45(-1.25,4.025) 46(-1.75,4.025) 47(-2.25,4.025) 48(-2.75,4.025)
  silkscreen extent -4.15,-2.85 2.85,3.55
"OSC 5032-2P" [mm] "5mm*3.2mm*0.8mm(长*宽*高)                  淘宝ID:黄晶宝石"
  rect 2.2x2.4 smd: 1(-1.75,0) 2(1.75,0)
  silkscreen extent -2.5,-1.6 2.5,1.6
"QFN32 5X5_N" [mm] "32脚，长x宽x高：5x5x0.95mm，脚距：0.5mm"
  rect 0.275x0.85 smd: 1(-1.751,-2.451)
  oval 0.275x0.85 smd: 2(-1.25,-2.451) 3(-0.75,-2.451) 4(-0.25,-2.451) 5(0.25,-2.451) 6(0.75,-2.451) 7(1.25,-2.451) 8(1.75,-2.451) 17(1.75,2.451) 18(1.25,2.451) 19(0.75,2.451) 20(0.25,2.451) 21(-0.25,2.451) 22(-0.75,2.451) 23(-1.25,2.451) 24(-1.75,2.451)
  oval 0.85x0.275 smd: 9(2.451,-1.75) 10(2.451,-1.25) 11(2.451,-0.75) 12(2.451,-0.25) 13(2.451,0.25) 14(2.451,0.75) 15(2.451,1.25) 16(2.451,1.75) 25(-2.451,1.75) 26(-2.451,1.25) 27(-2.451,0.75) 28(-2.451,0.25) 29(-2.451,-0.25) 30(-2.451,-0.75) 31(-2.451,-1.25) 32(-2.451,-1.75)
  round 0.025 smd paste+0 mask+0.102: " "(0,0)
  silkscreen extent -2.6,-3.12 2.6,2.6
"R 0603_L" [mil] "1/10W贴片电阻                 淘宝ID:黄晶宝石"
  rect 30x30 smd: 1(-25.59,0) 2(25.59,0)
  silkscreen extent -51,-26 51,26
"R 0805_L" [mil] "1/8W贴片电阻"
  rect 35x50 smd: 1(-37.4,0) 2(37.4,0)
  silkscreen extent -67,-36 67,36
"R 1210_L" [mil] "1/3W贴片电阻                                淘宝ID:黄晶宝石"
  rect 60x100 smd: 1(-57.09,0) 2(57.09,0)
  silkscreen extent -100,-63 100,63
SOD-323 [mm] "1.8x1.3X0.9mm（长宽高，不包括引脚）"
  rect 1x0.8 smd: 1(-1.4,0)
  oct 1x0.8 smd: 2(1.4,0)
  silkscreen extent -2.11,-0.76 2.11,0.76
SOP8_L [mm] "5*6*1.8mm（长宽高）封装库来自淘宝卖家 ID：黄晶宝石"
  rect 1.5x0.5 smd: 1(-2.5,1.905)
  oval 1.5x0.5 smd: 2(-2.5,0.635) 3(-2.5,-0.635) 4(-2.5,-1.905) 5(2.5,-1.905) 6(2.5,-0.635) 7(2.5,0.635) 8(2.5,1.905)
  silkscreen extent -2.69,-2.5 1.52,3.2
SOT23-5L [mm] "3x1.6x1.1mm(长宽高) 封装库来自淘宝卖家 ID：黄晶宝石"
  rect 0.45x0.8 smd: 1(-0.95,-1.4) 2(0,-1.4) 3(0.95,-1.4) 4(0.95,1.4) 5(-0.95,1.4)
  silkscreen extent -1.6,-1.73 1.5,0.66
SOT223_L [mm] "6.4x7x1.6mm(长宽高)"
  rect 0.75x1.7 smd: 1(-2.3,-3.048) 2(0,-3.048) 3(2.3,-3.048)
  rect 3.1x1.7 smd: 2(0,3.048)
  silkscreen extent -3.5,-3.88 3.25,1.75
SOT-23-3L [mm]
  rect 0.9x0.6 smd: 1(-1,0.95) 2(-1,-0.95) 3(1.2,0)
  silkscreen extent -1.72,-1.45 0.64,1.87
"TSW SMD-3*6*2.5" [mm] "3*6*2.5mm"
  rect 1.5x0.8 smd: 1(-3.9,0) 2(3.9,0)
  silkscreen extent -3.21,-1.9 3.09,1.9
USB-C-SMD_TYPE-C-USB-5 [mm]
  oval 1.2x2 hole 0.8 slot 1.6 at 90 deg: 0(-4.5,-2.475) 0(4.5,-2.475)
  oval 1.2x2.3 hole 0.7 slot 1.8 at 90 deg: 0(-4.5,1.675) 0(4.5,1.675)
  rect 0.3x1.15 smd: A1(-3.263,2.473) A4(-2.462,2.471) A5(-1.162,2.475) A6(-0.162,2.475) A7(0.337,2.473) A9(2.638,2.475) A12(3.438,2.475) B1(3.138,2.475) B4(2.337,2.475) B5(1.838,2.475) B6(0.838,2.475) B7(-0.663,2.473) B9(-2.162,2.471) B12(-2.963,2.473)
  rect 0.3x1.148 smd: A8(-1.663,2.475) B8(1.337,2.475)
  round 0.75 hole 0.75 unplated: ""(-2.803,1.175) ""(2.978,1.175)
  silkscreen extent -4.38,-5.08 4.56,2.75

## Part data
ANT1: library part ANT1, "PCB板载天线"
BK1: library part BK9530
C1 C2 C3 C4 C5 C6 C7 C8 C9 C10 C11 C12 C13 C14 C15 C16 C17 C18 C19 C20 C21 C22 C25 C26 C27 C28 C29 C30 C31 C32 C33 C34 C35 C36 C37 C38 C39 C40 C41 C42 C43 C44 C45 C46 C47 C48 C49 C50 C51 C52 C53: "Capacitor"
C23 C24: "Polarized Capacitor (Radial)"
D1: "开关二极管"
FB1 FB2 FB3 FB4 FB5 FB6 FB7: "铁氧体磁珠"
IC1: "外置EEPROM"
JP1: library part "Header 5", "5P接插件"
L1 L2 L3 L4 L5: "小功率贴片电感"
LED1 LED2 LED3 LED4: library part LED-SMD, "贴片LED"
P1 P2 P3: "Header, 3-Pin"
Q1: library part 8050-SMD, "高频放大-NPN型"
Q2: library part 8550-SMD, "高频放大-PNP型"
Q3: library part NMOS-2, "N-Channel Power MOSFET"
SW1 SW2: library part "TSW 3x6", "3x6轻触开关"
U1: library part STM32F103C8T6, "ARM"
U2: library part LT1117, "三端稳压芯片"
U3: "USB音频芯片"
U4: "LDO"
USBC1: library part "USB2.0 Type-C 16Pin母座", "USB2.0 Type-C 母座 16Pin"
Y1: library part XTAL, "Crystal Oscillator"
Y2: library part "SMD-5032_2P 8MHz 20ppm 20pF", "贴片晶振"

## Via types
v1: diameter 25, hole 12, Top Layer to Bottom Layer, tented both sides, 198 vias
v2: diameter 20, hole 12, Top Layer to Bottom Layer, tented both sides, 11 vias
v3: diameter 30, hole 15, Top Layer to Bottom Layer, tented both sides, 1 vias

## Nets (pads, with @x,y where several pads share a name; then routed paths per layer and width w, separated by ;. In a path a pad name is that pad's centre, name@x,y a point inside that pad or via, vN(x,y) a via of type N, cw(c..) or ccw(c..) an arc to the next point about the centre after c; other vN are vias at no path point)
3V3: C10.2 C11.2 C24.1 C36.1 C37.1 C45.1 FB2.1 IC1.8 P2.1 P3.1 Q2.2 R1.2 R2.2 R4.1 R5.1 R7.2 R8.1 R12.2 R13.2 R23.2 R24.2 R28.2 R31.2 U1.1 U1.24 U1.36 U1.48 U2.2 | length 668.2
  Top Layer w12: U1.1@678.19,1596.48 701.62,1596.48 728.39,1623.24 U1.48@728.39,1646.67 691.52,1646.67 v1(678.19,1660) ; U1.24@948,1329.67 v1(1005,1329.67) ; U1.36@995.12,1598 995.12,1646.52 v1(995.2,1646.59)
  Top Layer w15: R24.2@825.9,788.2 v1(901.1,788.2) ; IC1.8@901.1,909.78 957.28,909.78 986.12,938.62 v1(996.12,938.62)
  Top Layer w30: U2.2@455,355 U2.2@455,595
  other v1: 615,70 135.2,77.5 1773.4,163.08 512.36,225 1773.4,318 260.87,337.6 455,461.22 423.39,594.25 485.92,594.25 524.88,939.74 524.88,1024.74 521.06,1094.9 686.34,1205.01 89.26,1620.8 178.8,1803.21 541.24,1810.61 635.43,1810.61 729.62,1810.61
  other v2: 89.25,1552.58
  other v3: 358.15,822.51
+3.3V: C39.2 C46.2 FB4.1 U3.2 | length 766.4
  Top Layer w12: U3.2@1406.97,673.86 1440.4,673.86 1477.57,636.68 1477.57,494.38 C39.2@1486.35,485.61
  Top Layer w20: FB4.1@1135,174.41 1140,179.41 1174.41,179.41 1224.3,229.3 1257.79,229.3 1271.01,242.52 1298.41,242.52 1449.26,393.37 1449.26,449.82 C39.2@1485.05,485.61 ; C39.2@1478.85,485.61 C39.2@1485.05,485.61 ; C39.2@1492.55,485.61 1486.35,485.61 C39.2@1485.05,485.61
+3.3VA: C34.2 C35.2 C47.2 C48.2 FB4.2 U3.34 U3.46 | length 1052
  Top Layer w12: v1(1026.7,717.34) 1029.53,717.34 1052.56,694.31 U3.34@1090.04,694.31 1260.5,694.31 1317.4,637.41 U3.46@1317.4,604.74
  Top Layer w20: C34.2@880.71,528.21 v1(968.1,528.21) ; FB4.2@1137.95,228.54 1139.25,229.84 1139.25,313.01 1138.5,313.76 v1(1138.5,398.21)
  Bottom Layer w20: v1(1026.7,717.34) 1026.7,586.8 v1(968.1,528.21) 1047.07,449.25 1087.47,449.25 v1(1138.5,398.21)
BOOT0: R6.1 R11.2 U1.44 | length 1002
  Top Layer w10: v1(215,1223.34) 215,1190.68 285.4,1120.28 R6.1@285.4,1085.7 ; v1(801.31,1546.31) 801.31,1607.04 807.05,1612.78 807.05,1646.59 U1.44@807.13,1646.67
  SIG03 w20: v1(215,1223.34) 215,1244.38 516.93,1546.31 v1(801.31,1546.31)
CE: BK1.3 R32.2 U1.26 U4.3 | length 1474.3
  Top Layer w10: U1.26@995.12,1399.63 1049.63,1399.63 v1(1050,1400) ; v1(1465,1500) 1466.03,1498.97 1466.03,1459.87 BK1.3@1466.19,1459.71
  Top Layer w15: R32.2@1884.05,829.98 1885.12,831.04 U4.3@1885.12,904.87
  SIG03 w15: v1(1465,1500) 1466.91,1498.09 1475.63,1498.09 1661.92,1311.8 1661.92,1235.23 1778.35,1118.8 1782.74,1118.8 1885.11,1016.43 v1(1885.11,834.98)
  Bottom Layer w10: v1@1461.64,1500 v1(1465,1500)
  Bottom Layer w12: v1(1050,1400) 1133.21,1483.21 1444.85,1483.21 v1@1461.64,1500
D+: R20.1 USBC1.A6 USBC1.B6 | length 228.1
  Top Layer w10: R20.1@1596.48,605.32 R20.1@1589.1,597.94 1621.4,597.94 1653.39,565.95 USBC1.A6@1692.56,565.95 1693.33,566.73 1720.65,566.73 1728.26,574.34 1728.26,596.92 1720.65,604.54 1693.34,604.54 USBC1.B6@1692.56,605.32
D-: R21.2 USBC1.A7 USBC1.B7 | length 270.3
  Top Layer w10: R21.2@1589.09,665.84 1596.96,657.97 1617.76,657.97 1630.43,645.3 1630.43,624.26 1646.24,608.46 v2(1646.24,605.75) ; v2(1644.99,538.73) 1647.69,538.73 1655.22,546.26 USBC1.B7@1692.62,546.26 ; v2@1644.99,605.97 1664.54,586.42 1691.84,586.42 USBC1.A7@1692.62,585.63
  Bottom Layer w10: v2(1644.99,538.73) 1645.61,539.35 1645.61,605.13 v2(1646.24,605.75)
DTR: JP1.4 R9.1 | length 235.7
  Top Layer w10: JP1.4@96.65,1273.21 102.22,1267.65 259.85,1267.65 R9.1@304.16,1223.34 R9.1@311.66,1223.34
GND: C3.1 C10.1 C11.1 C19.2 C20.2 C23.2 C24.2 C26.1 C27.1 C28.1 C29.1 C33.1 C36.2 C37.2 C39.1 C41.1 C45.2 C46.1 C49.1 C50.1 C51.1 C52.2 C53.2 FB3.1 FB6.1 FB7.1 IC1.1 IC1.2 IC1.3 IC1.4 JP1.1 LED2.2 P1.1 P2.2 P3.2 Q3.2 R3.2 R6.2 R14.2 R15.2 R17.2 R25.1 R26.2 R30.1 SW1.2 SW2.1 U1.23 U1.35 U1.47 U2.1 U3.3 USBC1.0 USBC1.A1 USBC1.A12 USBC1.B1 USBC1.B12 | length 895.4
  Top Layer w12: U1.47@748.39,1646.36 748.39,1578.76 v1(748.85,1578.3) v1@749.31,1577.84 ; IC1.4@751.1,1106.63 v2(801.1,1106.63) v2(851.1,1106.63) v2(901.1,1106.63) ; U1.23@925.24,1329.74 v1(925.24,1390) ; v1(926.29,1576.79) U1.35@995.12,1576.79 ; v1(1340.81,715.68) 1362.18,694.31 U3.3@1406.97,694.31 ; C53.2@1640,1010 1650,1000 C53.2@1649.29,999.29
  Top Layer w25: FB7.1@1587.93,1010 C53.2@1640,1010 ; R17.2@1592.93,812.18 1592.93,860.68 1636.79,904.54 1644.29,904.54 1649.29,909.54 1649.29,917.04 C53.2@1649.29,999.29 ; 1702.7,714.28 1702.7,739.24 1712.97,749.51 USBC1.0@1724.06,749.51 ; 1702.76,437.31 1702.76,405.46 1713.04,395.18 USBC1.0@1724.06,395.18 ; v1(1885,1329.49) C19.2@1885,1411.88
  other v1: 1263.5,157.62 1060,170 944.33,195 307.64,225 1773.4,238 1527.6,245 1527.6,330 364.45,363.1 663.5,405 1492.54,408.21 1586.34,408.21 1398.74,410.81 663.5,490 663.5,691.05 1425,935 444.88,939.74 996.12,1018.62 444.88,1024.74 210.6,1085.7 443.86,1094.9 987.11,1147.21 1052.11,1147.21 419.49,1398.62 616.35,1586.41 616.35,1623.24 419.49,1628.32
GNDA: C34.1 C35.1 C40.1 C42.1 C43.1 C44.1 C47.1 C48.1 FB6.2 U3.27 U3.36 U3.44 | length 307.3
  Top Layer w12: v1(961.25,610.41) 971.25,610.41 1015.78,654.94 U3.36@1090.04,654.94 ; U3.27@1090.04,832.11 1134.39,832.11 v1(1169.69,796.81) ; v1(1254.59,660.85) 1278.03,637.41 U3.44@1278.03,604.74
  other v1: 1060,230 1058.5,308.21 1058.5,398.21 878.1,448.21 968.1,448.21 1061.14,503.21 1208.5,503.21 874.64,610.41